# Altium PCB PCB1.PcbDoc
Units mm, origin at the board's own origin, x right, y up, seen from the top; angles counter-clockwise.
Board outline 150 x 150 mm, 2 copper layers (Top Layer, Bottom Layer); 28 components, 29 nets, 92 pads, 0 vias.
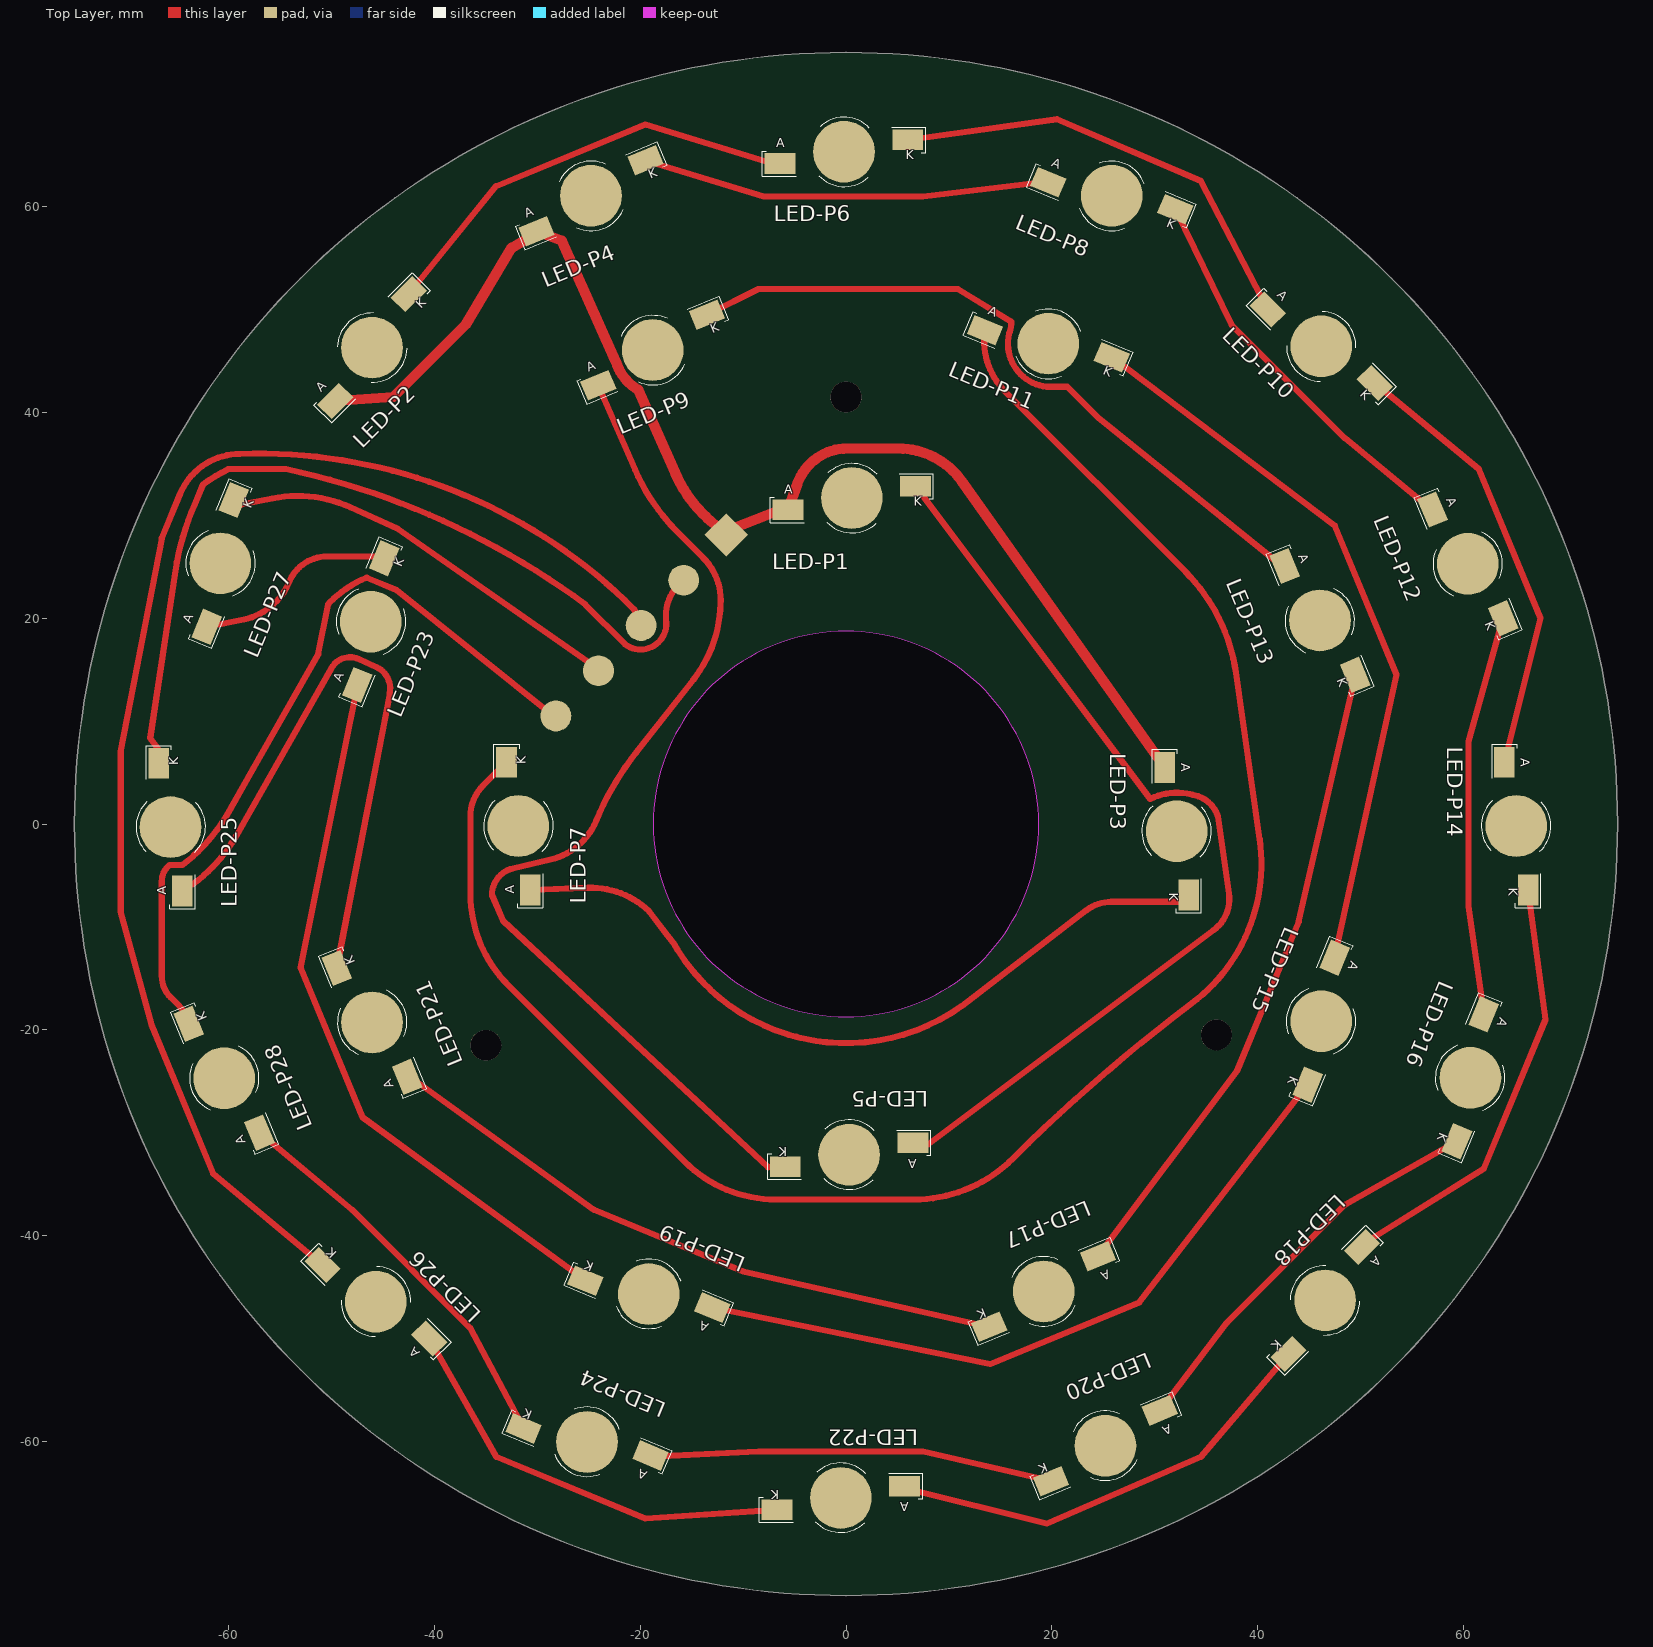
[diagram p0: Top Layer view]
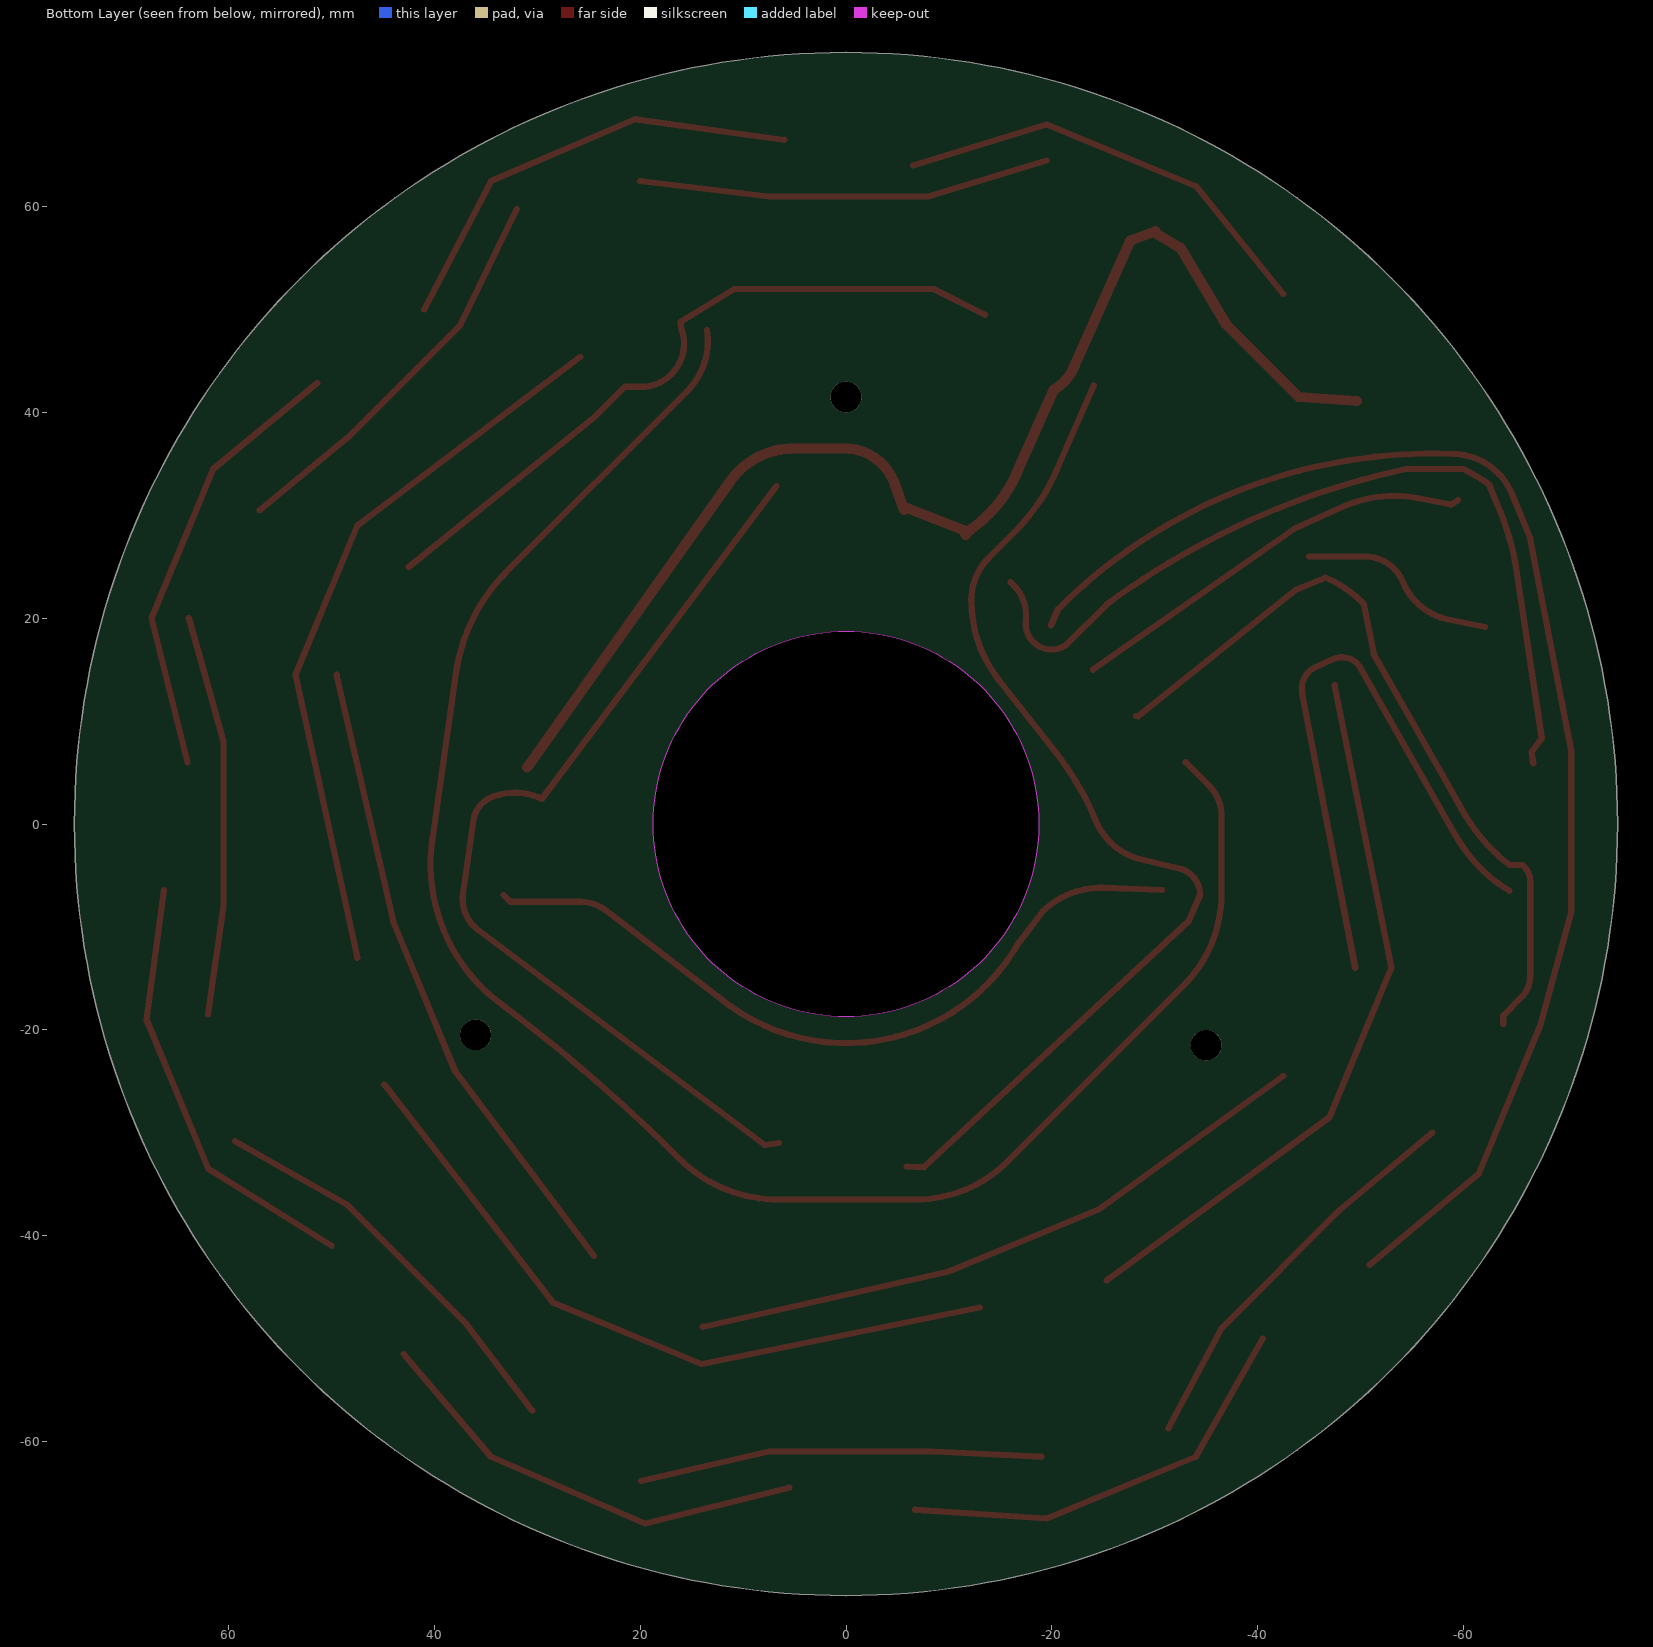
[diagram p1: Bottom Layer view, seen from below]
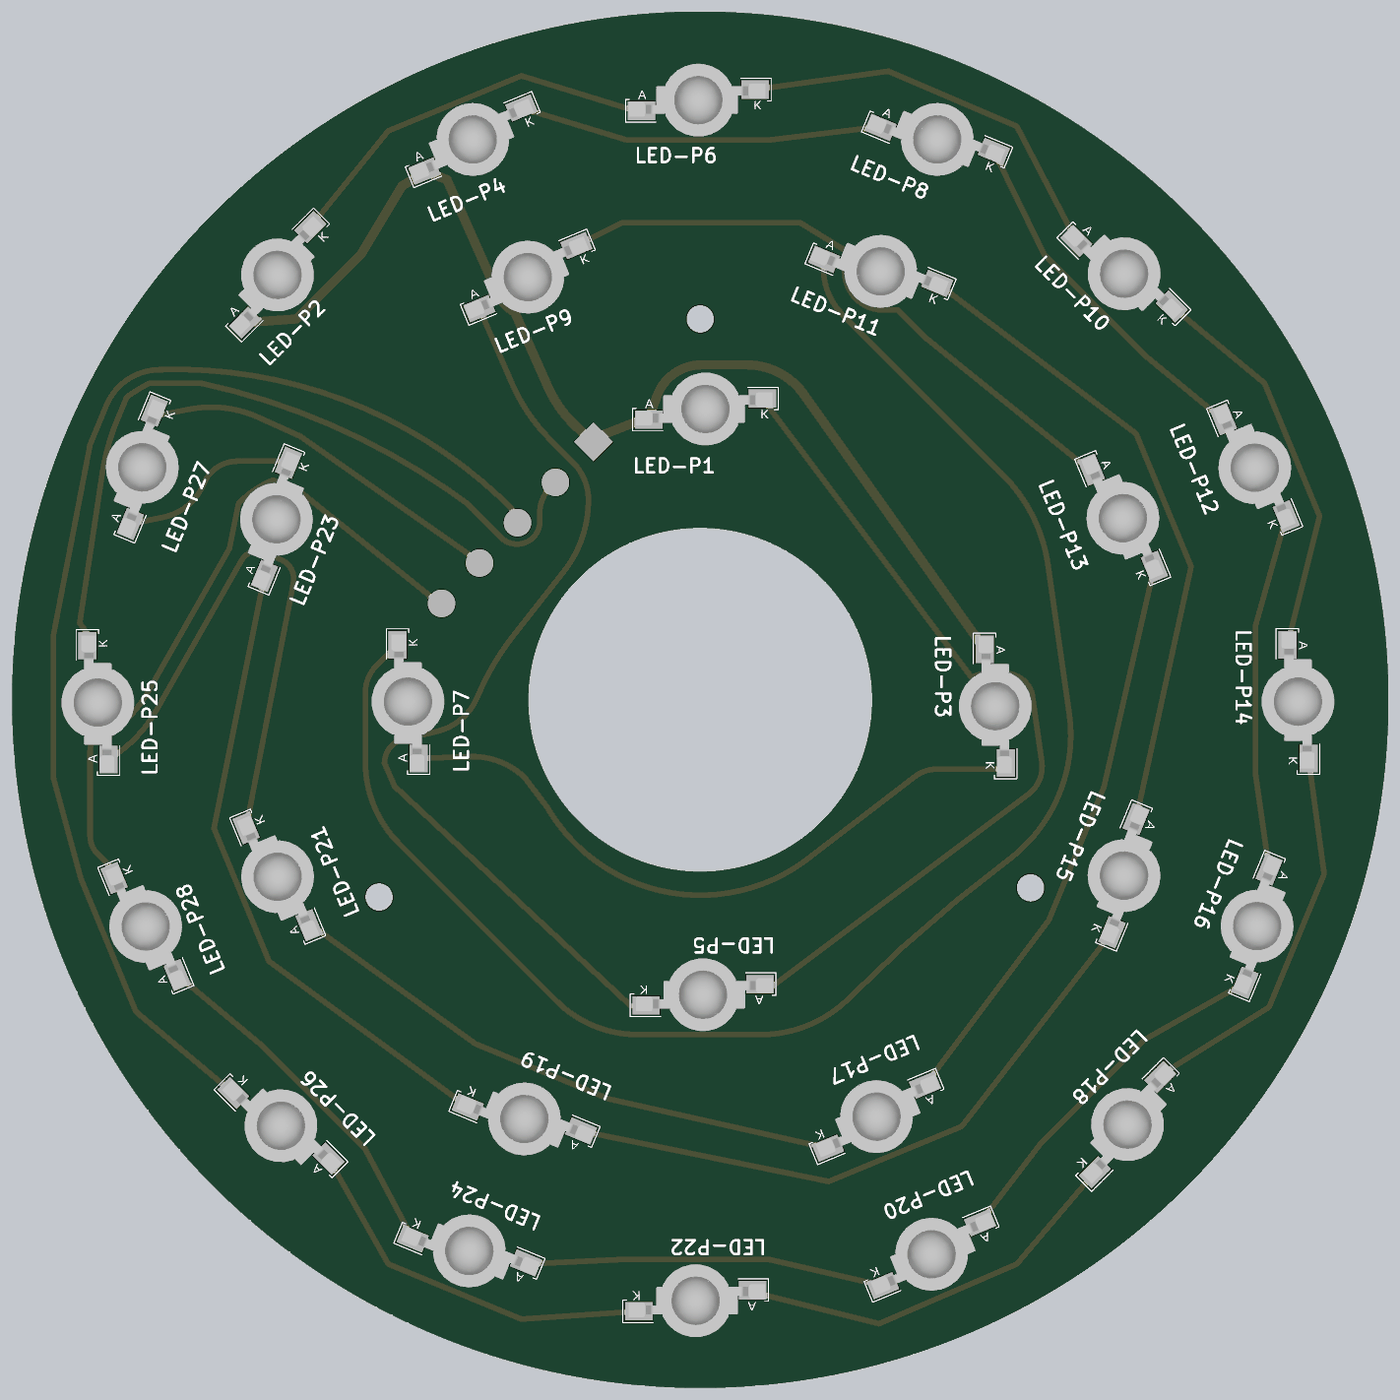
[diagram p2: 3D render of the assembled board from above, using the file's embedded part models]

## Layer stack, top to bottom
Top Solder: solder mask 0.0102, Solder Resist, Dk 3.5
Top Layer: signal copper 0.0356
Dielectric 1: dielectric 0.32, FR-4, Dk 4.8
Bottom Layer: signal copper 0.0356
Bottom Solder: solder mask 0.0102, Solder Resist, Dk 3.5

## Board outline
-75,0 ccw(c0,0) 0,-75 ccw(c0,0) 75,0 ccw(c0,0) 0,75 ccw(c0,0)
cut-out: -18.742,0 ccw(c0,0) 0,-18.742 ccw(c0,0) 18.742,0 ccw(c0,0) 0,18.742 ccw(c0,0)

## Design rules (kind name [scope] priority, off if disabled: settings)
Clearance [All] p1: gap=0.254 ignorepadtopadclearanceinfootprint=FALSE except(0: Arc-Hole Track-Hole SMDPad-Hole THPad-Hole Via-Hole Fill-Hole Poly-Hole Region-Hole Text-Hole)
PolygonConnect [All] p1: connectstyle=Relief reliefconductorwidth=0.254 reliefentries=4 polygonreliefangle="90 Angle" airgapwidth=0.254
RoutingVias [All] p1: holewidth=0.711 width=1.27 viastyle="Through Hole" minholewidth=0.711 minwidth=1.27 maxholewidth=0.711 maxwidth=1.27
SolderMaskExpansion [All] p1: expansion=0.102 istentingtop=FALSE
Width [All] p1: maxlimit=1 minlimit=0.254 preferedwidth=0.6
30 further rules are at their usual default settings.

## Components (designator, comment, footprint, x,y, rotation, side; value= is the part's Value field where it differs from the comment)
LED-P1 "3.3V 300mA White" PCBComponent_1 -5.63,30.537 r0 top
LED-P2 "3.3V 300mA White" PCBComponent_1 -49.642,41.106 r45 top
LED-P3 "3.3V 300mA White" PCBComponent_1 31,5.5 r270 top
LED-P4 "3.3V 300mA White" PCBComponent_1 -30.076,57.63 r22.5 top
LED-P5 "3.3V 300mA White" PCBComponent_1 6.5,-31 r180 top
LED-P6 "3.3V 300mA White" PCBComponent_1 -6.4,64.2 r0 top
LED-P7 "3.3V 300mA White" PCBComponent_1 -30.7,-6.4 r90 top
LED-P8 "3.3V 300mA White" PCBComponent_1 19.664,62.377 r337.5 top
LED-P9 "3.3V 300mA White" PCBComponent_1 -24.076,42.63 r22.5 top
LED-P10 "3.3V 300mA White" PCBComponent_1 41,50 r315 top
LED-P11 "3.3V 300mA White" PCBComponent_1 13.5,48 r337.5 top
LED-P12 "3.3V 300mA White" PCBComponent_1 57.007,30.576 r292.5 top
LED-P13 "3.3V 300mA White" PCBComponent_1 42.63,25.076 r292.5 top
LED-P14 "3.3V 300mA White" PCBComponent_1 64,6 r270 top
LED-P15 "3.3V 300mA White" PCBComponent_1 47.5,-13 r247.5 top
LED-P16 "3.3V 300mA White" PCBComponent_1 62,-18.5 r247.5 top
LED-P17 "3.3V 300mA White" PCBComponent_1 24.5,-42 r202.5 top
LED-P18 "3.3V 300mA White" PCBComponent_1 50.142,-41.106 r225 top
LED-P19 "3.3V 300mA White" PCBComponent_1 -13,-47 r157.5 top
LED-P20 "3.3V 300mA White" PCBComponent_1 30.5,-57 r202.5 top
LED-P21 "3.3V 300mA White" PCBComponent_1 -42.63,-24.576 r112.5 top
LED-P22 "3.3V 300mA White" PCBComponent_1 5.7,-64.35 r180 top
LED-P23 "3.3V 300mA White" PCBComponent_1 -47.5,13.5 r67.5 top
LED-P24 "3.3V 300mA White" PCBComponent_1 -19,-61.377 r157.5 top
LED-P25 "3.3V 300mA White" PCBComponent_1 -64.5,-6.5 r90 top
LED-P26 "3.3V 300mA White" PCBComponent_1 -40.5,-50 r135 top
LED-P27 "3.3V 300mA White" PCBComponent_1 -62.12,19.164 r67.5 top
LED-P28 "3.3V 300mA White" PCBComponent_1 -57.007,-30 r112.5 top

## Footprints (in the part's own frame and the unit in brackets; to place one, negate y for a bottom-side part, rotate by r counter-clockwise, add the part's x,y. Pads: shape width x height; smd on the part's side, far side on the other; paste and mask are expansions set on the pad)
PCBComponent_1 [mm]
  rect 3x2 smd: A(0,0) K(12.4,2.3)
  round 6 smd: P(6.2,1.15)
  silkscreen extent -1.75,-2.25 14.13,4.51, body extent -1.4,-2.83 13.5,5.13, height 5.1

## Part data
LED-P1 LED-P2 LED-P3 LED-P4 LED-P5 LED-P6 LED-P7 LED-P8 LED-P9 LED-P10 LED-P11 LED-P12 LED-P13 LED-P14 LED-P15 LED-P16 LED-P17 LED-P18 LED-P19 LED-P20 LED-P21 LED-P22 LED-P23 LED-P24 LED-P25 LED-P26 LED-P27 LED-P28: library part "LED white P1", "High power 1W light emitting diode White"

## Free pads (board coordinates)
  round 3 smd: 29(-28.194,10.501) 29(-24.055,14.899) 29(-19.916,19.296) 29(-15.777,23.694)
  rect 3x3 smd rot 45: 29(-11.639,28.092)
  round 3 hole 3 unplated: 30(-35,-21.5) 30(0,41.5) 30(36,-20.5)

## Nets (pads, with @x,y where several pads share a name; then routed paths per layer and width w, separated by ;. In a path a pad name is that pad's centre, name@x,y a point inside that pad or via, vN(x,y) a via of type N, cw(c..) or ccw(c..) an arc to the next point about the centre after c; other vN are vias at no path point)
+24V: LED-P1.A LED-P2.A LED-P3.A LED-P4.A pad.29@-11.639,28.092 | length 125.2
  Top Layer w1: LED-P2.A -44,41.5 -37,48.5 -32.5,56 -30.075,57.455 -30.075,57.499 LED-P4.A -27.609,56.681 -22.586,45.379 ccw(c-19.115,46.78) -22.363,44.919 ; -22.363,44.919 ccw(c-17.703,46.413) -20.203,42.206 -16.608,34.118 ccw(c-4.318,39.58) -11.688,28.33 -11.639,28.092 -11.442,28.542 -5.974,30.687 LED-P1.A -4.721,33.083 cw(c0.129,31.351) 0.129,36.5 5.096,36.5 cw(c5.096,28.942) 11.259,33.316 LED-P3.A
CH1: LED-P25.K pad.29@-15.777,23.694 | length 84.2
  Top Layer w0.6: LED-P25.K -66.634,7.004 -67.63,8.353 -65.181,24.622 cw(c-40.412,20.893) -63.304,31.058 -62.5,33 cw(c-50.85,16.702) -60.047,34.5 -54.418,34.5 cw(c-70.243,-39.164) -25.334,21.334 -21.458,17.458 ccw(c-19.963,19.453) -17.5,19.836 -17.5,20.293 cw(c-13.379,20.293) -16.293,23.207 pad.29@-16,23.5
CH2: LED-P26.K pad.29@-19.916,19.296 | length 133.7
  Top Layer w0.6: LED-P26.K -61.5,-34 -67.5,-19.5 -70.5,-8.5 -70.5,7 -66.503,27.784 -64.73,32.069 cw(c-58.888,29.652) -58.888,35.974 cw(c-57.099,-15.601) -20.609,20.89 pad.29@-19.916,19.296
CH3: LED-P27.K pad.29@-24.055,14.899 | length 40.6
  Top Layer w0.6: LED-P27.K -58.808,31.038 -55.774,31.645 cw(c-53.313,19.34) -48.148,30.777 -43.61,28.727 pad.29@-24,15
CH4: LED-P28.K pad.29@-28.194,10.501 | length 74.9
  Top Layer w0.6: LED-P28.K -63.877,-18.623 -65.646,-16.854 cw(c-63.586,-14.793) -66.5,-14.793 -66.5,-9.293 -66.5,-5.548 cw(c-64.509,-5.548) -65.761,-4 -64.5,-4 ccw(c-75.29,9.951) -60.304,0.652 -57.614,5.386 -51.303,16.494 -50.346,21.312 cw(c-49.731,21.058) -50.202,21.529 cw(c-42.324,13.651) -46.579,23.947 -43.688,22.75 -28.409,10.477 pad.29@-28.194,10.501
NetLED-P1_K: LED-P1.K LED-P5.A | length 93.5
  Top Layer w0.6: LED-P5.A 7.9,-31.2 35.749,-10.313 ccw(c33.482,-7.29) 37.223,-6.756 36.154,0.721 ccw(c33.219,-0.207) 33.692,2.836 ccw(c32.593,-0.538) 33.138,2.968 ccw(c32.207,-3.02) 29.571,2.436 LED-P1.K
NetLED-P2_K: LED-P2.K LED-P6.A | length 42.8
  Top Layer w0.6: LED-P2.K -34,62 -19.5,68 LED-P6.A@-6.5,64
NetLED-P3_K: LED-P3.K LED-P7.A | length 74
  Top Layer w0.6: LED-P7.A -25.087,-6.2 cw(c-24.796,-14.346) -19.136,-8.48 -17.355,-10.827 -16.64,-11.77 -16.404,-12.179 ccw(c-15.924,-11.902) -16.385,-12.21 -15.703,-13.23 ccw(c-15.242,-12.922) -15.682,-13.26 -14.935,-14.233 ccw(c-14.495,-13.896) -14.912,-14.261 -14.103,-15.184 ccw(c-13.686,-14.819) -14.078,-15.211 -13.88,-15.408 -13.211,-16.078 ccw(c-12.819,-15.686) -13.184,-16.103 -12.261,-16.912 ccw(c-11.896,-16.495) -12.233,-16.935 -11.26,-17.682 ccw(c-10.922,-17.242) -11.23,-17.703 -10.21,-18.385 ccw(c-9.902,-17.924) -10.179,-18.404 -9.983,-18.517 -9.116,-19.017 ccw(c-8.839,-18.538) -9.085,-19.034 -7.984,-19.577 ccw(c-7.739,-19.08) -7.951,-19.592 -6.817,-20.062 ccw(c-6.605,-19.55) -6.783,-20.074 -5.621,-20.469 ccw(c-5.443,-19.944) -5.587,-20.479 -5.496,-20.504 -4.813,-20.687 -4.401,-20.797 ccw(c-4.258,-20.262) -4.366,-20.805 -3.163,-21.045 ccw(c-3.055,-20.501) -3.127,-21.051 -2.923,-21.077 -1.91,-21.211 ccw(c-1.838,-20.661) -1.874,-21.214 -0.65,-21.294 ccw(c-0.614,-20.742) -0.614,-21.296 0.614,-21.296 ccw(c0.614,-20.742) 0.65,-21.294 ; 0.65,-21.294 1.874,-21.214 ccw(c1.838,-20.661) 1.91,-21.211 3.127,-21.051 ccw(c3.055,-20.501) 3.163,-21.045 4.366,-20.805 ccw(c4.258,-20.262) 4.401,-20.797 5.587,-20.479 ccw(c5.443,-19.944) 5.621,-20.469 6.783,-20.074 ccw(c6.605,-19.55) 6.817,-20.062 7.951,-19.592 ccw(c7.739,-19.08) 7.984,-19.577 9.085,-19.034 ccw(c8.839,-18.538) 9.116,-19.017 10.179,-18.404 ccw(c9.902,-17.924) 10.21,-18.385 11.23,-17.703 ccw(c10.922,-17.242) 11.26,-17.682 23.383,-8.379 cw(c25.79,-11.516) 25.79,-7.562 32.638,-7.562 LED-P3.K
NetLED-P4_K: LED-P4.K LED-P8.A | length 40.1
  Top Layer w0.6: LED-P4.K -8,61 7.5,61 19.654,62.458 LED-P8.A@20,62.5
NetLED-P5_K: LED-P5.K LED-P9.A | length 102.4
  Top Layer w0.6: LED-P9.A -20.495,34.426 ccw(c-2.38,42.333) -16.356,28.356 -13.892,25.892 cw(c-18.037,21.748) -12.191,21.33 -12.229,20.789 cw(c-24.596,21.673) -14.847,14.013 -20.373,6.98 ccw(c2.159,-10.723) -24.291,0.298 cw(c-30.191,2.756) -28.727,-3.465 -32.381,-4.325 ccw(c-31.777,-6.895) -34.417,-6.895 -33.314,-9.428 -7.574,-33.361 LED-P5.K
NetLED-P6_K: LED-P6.K LED-P10.A | length 44
  Top Layer w0.6: LED-P6.K 20.5,68.5 34.5,62.5 LED-P10.A
NetLED-P7_K: LED-P7.K LED-P11.A | length 182.1
  Top Layer w0.6: LED-P7.K -35.293,3.707 ccw(c-32.379,0.793) -36.5,0.793 -36.5,-4.665 -36.5,-6.793 ccw(c-23.929,-6.793) -32.818,-15.682 -15.682,-32.818 ccw(c-6.793,-23.929) -6.793,-36.5 -3.045,-36.5 6.586,-36.5 ccw(c6.586,-22.849) 16.238,-32.502 cw(c130.732,-146.996) 33.581,-17.461 ccw(c23.397,-3.869) 40.21,-1.468 37.9,14.7 ccw(c20.75,12.25) 33,24.5 15.494,42.006 cw(c20.483,46.994) LED-P11.A
NetLED-P8_K: LED-P8.K LED-P12.A | length 39.1
  Top Layer w0.6: LED-P8.K 37.5,48.5 48.5,37.5 56.967,30.527 LED-P12.A@57,30.5
NetLED-P9_K: LED-P9.K LED-P13.A | length 68.7
  Top Layer w0.6: LED-P9.K -8.5,52 10.875,52 16.054,48.813 cw(c13.366,48.682) 15.853,47.652 ccw(c19.958,46.692) 19.5,42.5 21.5,42.5 24.5,39.5 LED-P13.A@42.5,25
NetLED-P10_K: LED-P10.K LED-P14.A | length 43.2
  Top Layer w0.6: LED-P10.K 61.5,34.5 67.5,20 LED-P14.A
NetLED-P11_K: LED-P11.K LED-P15.A | length 71
  Top Layer w0.6: LED-P11.K 47.5,29 53.5,14.5 LED-P15.A
NetLED-P12_K: LED-P12.K LED-P16.A | length 39.1
  Top Layer w0.6: LED-P16.A 60.5,-8 60.5,8 LED-P12.K
NetLED-P13_K: LED-P13.K LED-P17.A | length 62.8
  Top Layer w0.6: LED-P17.A 38,-24 44,-9.5 LED-P13.K
NetLED-P14_K: LED-P14.K LED-P18.A | length 42.6
  Top Layer w0.6: LED-P18.A@50,-41 50.055,-40.966 62,-33.5 68,-19 LED-P14.K
NetLED-P15_K: LED-P15.K LED-P19.A | length 70
  Top Layer w0.6: LED-P19.A 14,-52.5 28.5,-46.5 LED-P15.K
NetLED-P16_K: LED-P16.K LED-P20.A | length 39.5
  Top Layer w0.6: LED-P20.A 37,-48.5 48.5,-37 LED-P16.K
NetLED-P17_K: LED-P17.K LED-P21.A | length 62.4
  Top Layer w0.6: LED-P21.A@-42.5,-24.5 -24.5,-37.5 -10,-43.5 LED-P17.K
NetLED-P18_K: LED-P18.K LED-P22.A | length 43.9
  Top Layer w0.6: LED-P22.A@5.5,-64.5 5.653,-64.538 19.5,-68 34.5,-61.5 LED-P18.K
NetLED-P19_K: LED-P19.K LED-P23.A | length 70.6
  Top Layer w0.6: LED-P23.A -53,-14 -47,-28.5 LED-P19.K
NetLED-P20_K: LED-P20.K LED-P24.A | length 39.3
  Top Layer w0.6: LED-P24.A@-19,-61.5 -18.994,-61.5 -8.5,-61 7.5,-61 LED-P20.K
NetLED-P21_K: LED-P21.K LED-P25.A | length 61.5
  Top Layer w0.6: LED-P25.A ccw(c-72.062,6.104) -59.283,-1.157 -50.003,15.175 cw(c-48.217,14.159) -47.366,16.03 -45.644,15.247 cw(c-46.593,13.161) -44.342,12.727 LED-P21.K
NetLED-P22_K: LED-P22.K LED-P26.A | length 41.7
  Top Layer w0.6: LED-P26.A -34,-61.5 -19.5,-67.5 LED-P22.K
NetLED-P23_K: LED-P23.K LED-P27.A | length 19.8
  Top Layer w0.6: LED-P27.A -58.526,19.889 ccw(c-59.721,25.81) -54.222,23.311 -54.056,23.676 cw(c-50.447,22.035) -50.447,26 LED-P23.K@-45,26
NetLED-P24_K: LED-P24.K LED-P28.A | length 39
  Top Layer w0.6: LED-P28.A@-57,-30 -48,-37.5 -36.5,-49 LED-P24.K
pads on no net: LED-P1.P LED-P2.P LED-P3.P LED-P4.P LED-P5.P LED-P6.P LED-P7.P LED-P8.P LED-P9.P LED-P10.P LED-P11.P LED-P12.P LED-P13.P LED-P14.P LED-P15.P LED-P16.P LED-P17.P LED-P18.P LED-P19.P LED-P20.P LED-P21.P LED-P22.P LED-P23.P LED-P24.P LED-P25.P LED-P26.P LED-P27.P LED-P28.P

## Silkscreen, mask and mechanical layers (free items; w line width, h text height)
Mechanical 1:
  lines w0.254: -75,0 cw(c0,0) 0,75 cw(c0,0) 75,0 cw(c0,0) 0,-75 cw(c0,0) -75,0 ; -18.742,0 cw(c0,0) 0,18.742 cw(c0,0) 18.742,0 cw(c0,0) 0,-18.742 cw(c0,0) -18.742,0

## Text inside footprints (layer, text, board x,y; h text height)
LED-P1: Top Overlay "K" at 6.562,30.664 h1.52; Top Overlay "A" at -6.011,31.807 h1.52
LED-P2: Top Overlay "K" at -41.111,49.816 h1.52 r45; Top Overlay "A" at -50.809,41.734 h1.52 r45
LED-P3: Top Overlay "K" at 31.127,-6.692 h1.52 r270; Top Overlay "A" at 32.27,5.881 h1.52 r270
LED-P4: Top Overlay "K" at -18.861,62.413 h1.52 r22.5; Top Overlay "A" at -30.914,58.657 h1.52 r22.5
LED-P5: Top Overlay "K" at -5.692,-31.127 h1.52 r180; Top Overlay "A" at 6.881,-32.27 h1.52 r180
LED-P6: Top Overlay "K" at 5.792,64.327 h1.52; Top Overlay "A" at -6.781,65.47 h1.52
LED-P7: Top Overlay "K" at -30.827,5.792 h1.52 r90; Top Overlay "A" at -31.97,-6.781 h1.52 r90
LED-P8: Top Overlay "K" at 30.976,57.829 h1.52 r337.5; Top Overlay "A" at 19.798,63.697 h1.52 r337.5
LED-P9: Top Overlay "K" at -12.861,47.413 h1.52 r22.5; Top Overlay "A" at -24.914,43.657 h1.52 r22.5
LED-P10: Top Overlay "K" at 49.711,41.469 h1.52 r315; Top Overlay "A" at 41.629,51.167 h1.52 r315
LED-P11: Top Overlay "K" at 24.813,43.452 h1.52 r337.5; Top Overlay "A" at 13.634,49.319 h1.52 r337.5
LED-P12: Top Overlay "K" at 61.79,19.361 h1.52 r292.5; Top Overlay "A" at 58.035,31.414 h1.52 r292.5
LED-P13: Top Overlay "K" at 47.413,13.861 h1.52 r292.5; Top Overlay "A" at 43.657,25.914 h1.52 r292.5
LED-P14: Top Overlay "K" at 64.127,-6.192 h1.52 r270; Top Overlay "A" at 65.27,6.381 h1.52 r270
LED-P15: Top Overlay "K" at 42.952,-24.313 h1.52 r247.5; Top Overlay "A" at 48.819,-13.134 h1.52 r247.5
LED-P16: Top Overlay "K" at 57.452,-29.813 h1.52 r247.5; Top Overlay "A" at 63.319,-18.634 h1.52 r247.5
LED-P17: Top Overlay "A" at 25.338,-43.028 h1.52 r202.5; Top Overlay "K" at 13.285,-46.783 h1.52 r202.5
LED-P18: Top Overlay "K" at 41.611,-49.816 h1.52 r225; Top Overlay "A" at 51.309,-41.734 h1.52 r225
LED-P19: Top Overlay "K" at -24.313,-42.452 h1.52 r157.5; Top Overlay "A" at -13.134,-48.319 h1.52 r157.5
LED-P20: Top Overlay "K" at 19.285,-61.783 h1.52 r202.5; Top Overlay "A" at 31.338,-58.028 h1.52 r202.5
LED-P21: Top Overlay "K" at -47.413,-13.361 h1.52 r112.5; Top Overlay "A" at -43.657,-25.414 h1.52 r112.5
LED-P22: Top Overlay "K" at -6.492,-64.477 h1.52 r180; Top Overlay "A" at 6.081,-65.62 h1.52 r180
LED-P23: Top Overlay "K" at -42.952,24.813 h1.52 r67.5; Top Overlay "A" at -48.819,13.634 h1.52 r67.5
LED-P24: Top Overlay "K" at -30.313,-56.829 h1.52 r157.5; Top Overlay "A" at -19.134,-62.697 h1.52 r157.5
LED-P25: Top Overlay "K" at -64.627,5.692 h1.52 r90; Top Overlay "A" at -65.77,-6.881 h1.52 r90
LED-P26: Top Overlay "A" at -41.129,-51.167 h1.52 r135; Top Overlay "K" at -49.211,-41.469 h1.52 r135
LED-P27: Top Overlay "K" at -57.572,30.476 h1.52 r67.5; Top Overlay "A" at -63.439,19.298 h1.52 r67.5
LED-P28: Top Overlay "K" at -61.79,-18.785 h1.52 r112.5; Top Overlay "A" at -58.035,-30.838 h1.52 r112.5